# Altium PCB Buck-Boost Controller.PcbDoc
Units mm, origin at the board's own origin, x right, y up, seen from the top; angles counter-clockwise.
Board outline 34.92 x 11.94 mm, 2 copper layers (Top Layer, Bottom Layer); 13 components, 8 nets, 39 pads, 15 vias.
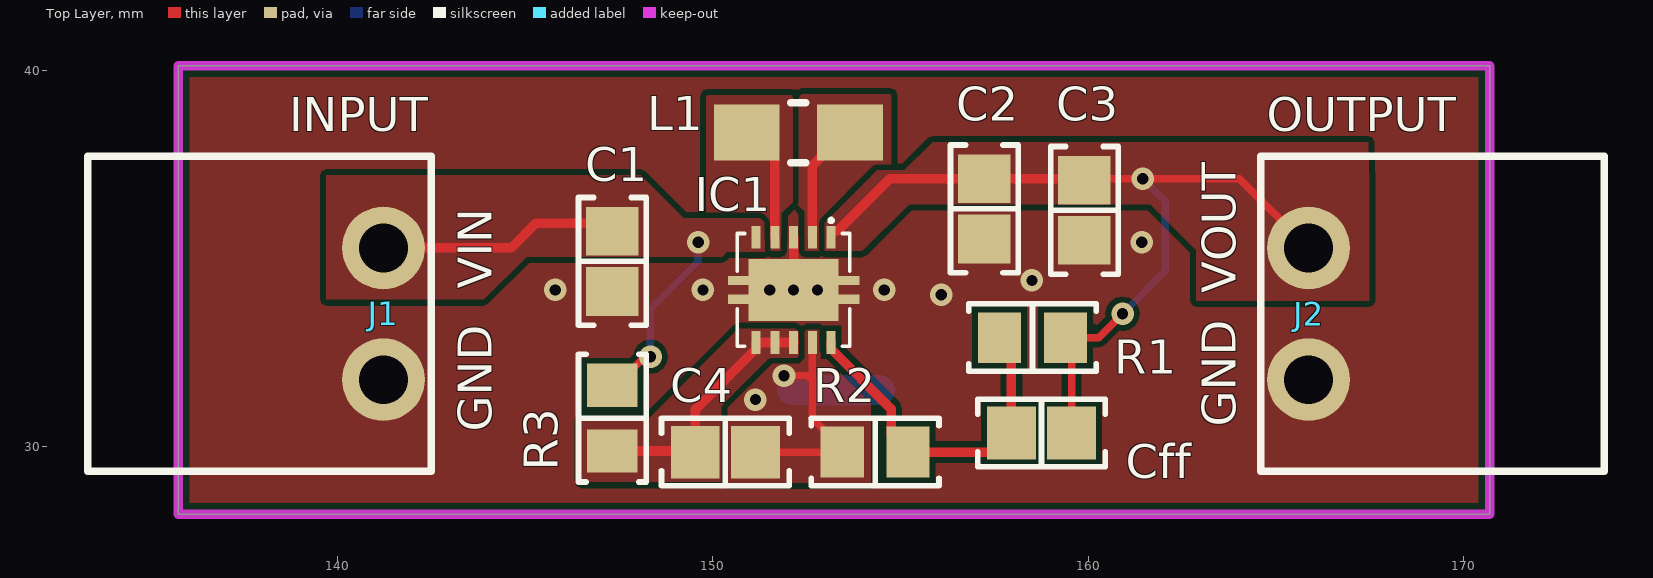
[diagram p0: Top Layer view]
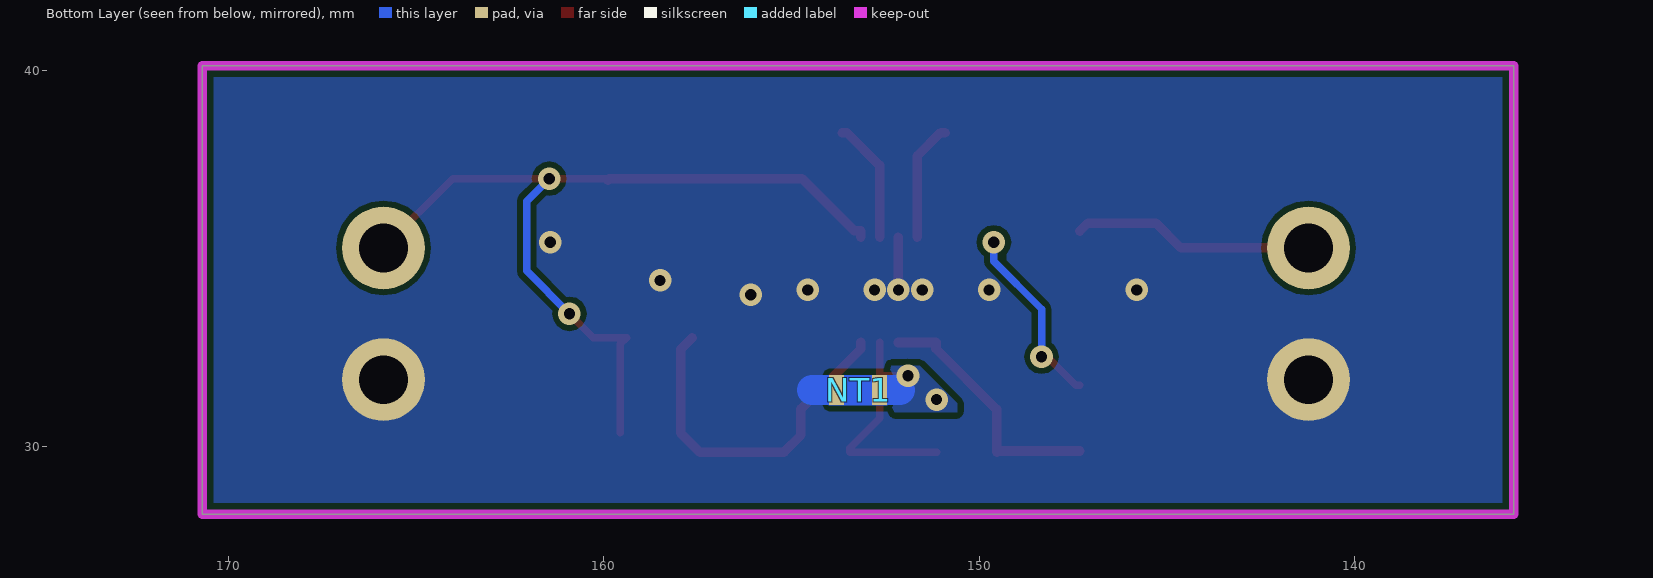
[diagram p1: Bottom Layer view, seen from below]
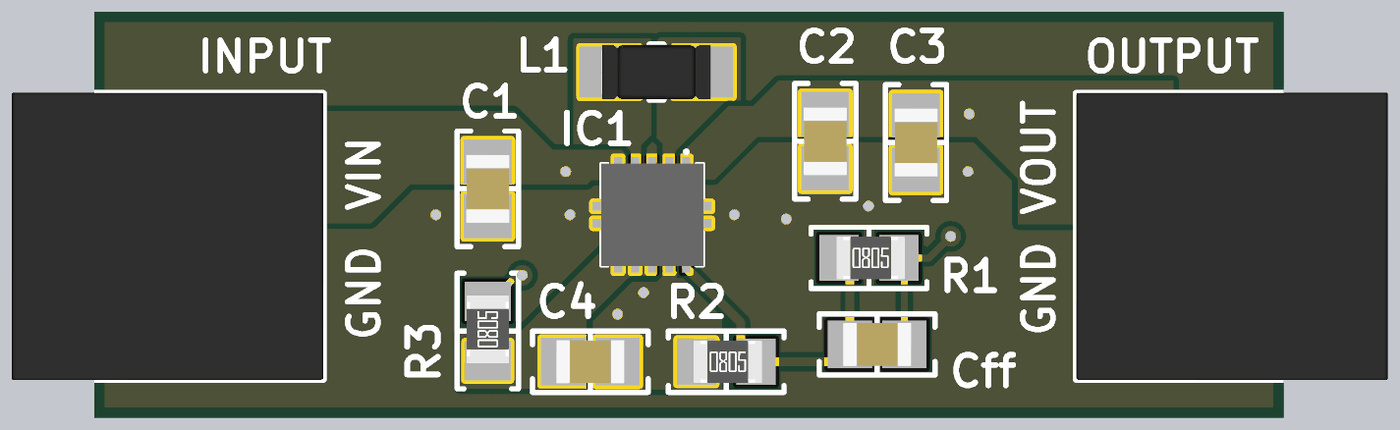
[diagram p2: 3D render of the assembled board from above, using the file's embedded part models]

## Layer stack, top to bottom
Top Solder: solder mask 0.0102, Solder Resist, Dk 3.5
Top Layer: signal copper 0.0356
Dielectric 1: dielectric 0.32, FR-4, Dk 4.8
Bottom Layer: signal copper 0.0356
Bottom Solder: solder mask 0.0102, Solder Resist, Dk 3.5

## Board outline
135.763,28.194 135.763,40.132 170.688,40.132 170.688,28.194

## Design rules (kind name [scope] priority, off if disabled: settings)
BoardOutlineClearance [All] p1: gap=0.3 ignorepadtopadclearanceinfootprint=FALSE
Clearance [All] p1: gap=0.15 ignorepadtopadclearanceinfootprint=FALSE
HoleSize [All] p1: absolutevalues=TRUE maxlimit=6.3 minlimit=0.2 maxpercent=80.000 minpercent=20.000
PolygonConnect [All] p1: connectstyle=Direct reliefconductorwidth=0.254 reliefentries=4 polygonreliefangle="90 Angle" airgapwidth=0.254
RoutingVias [All] p1: holewidth=0.6 width=1.2 viastyle="Through Hole" minholewidth=0.2 minwidth=0.5 maxholewidth=0.3 maxwidth=0.6
ShortCircuit ShortCircuit_1 [All] p1: allowed=FALSE
ShortCircuit NET_TIE [InNet('GND') And OnLayer('Bottom Layer') vs InNet('PGND') And OnLayer('Bottom Layer')] p2: allowed=FALSE
SilkToSilkClearance [All] p1: silktosilkclearance=0.16
SolderMaskExpansion [All] p1: expansion=0.102 istentingtop=FALSE
Width [All] p1: maxlimit=1 minlimit=0.127 preferedwidth=0.2
27 further rules are at their usual default settings.

## Components (designator, comment, footprint, x,y, rotation, side; value= is the part's Value field where it differs from the comment)
C1 "10µF" "CAP 0805_2012" 147.32,34.925 r90 top
C2 "10µF" "CAP 0805_2012" 157.226,36.322 r90 top
C3 "22µF" "CAP 0805_2012" 159.893,36.284 r90 top
C4 "0.1µF" "CAP 0805_2012" 150.33,29.845 r180 top
Cff "2.2pF" "CAP 0805_2012" 158.75,30.353 r0 top
IC1 "TPS63000" TPS63002DRCR 152.146,34.163 r270 top
J1 "0395021002" "MOLEX 395021002" 137.922,33.528 r90 top
J2 "0395021002" "MOLEX 395021002" 169.164,33.528 r270 top
L1 "2.2µH" "MURATA LQH31" 152.273,38.354 r0 top
NT1 "NetTie" NetTie_Narrow2 153.222,31.496 r180 bottom net-tie
R1 "1 MOhms" "RES 0805_2012" 158.51,32.893 r0 top
R2 "200 kOhms" "RES 0805_2012" 154.319,29.845 r0 top
R3 "100 Ohms" "RES 0805_2012" 147.32,30.748 r90 top

## Footprints (in the part's own frame and the unit in brackets; to place one, negate y for a bottom-side part, rotate by r counter-clockwise, add the part's x,y. Pads: shape width x height; smd on the part's side, far side on the other; paste and mask are expansions set on the pad)
"CAP 0805_2012" [mm] "Chip Capacitor, 2-Leads, Body 2.00x1.20mm, IPC Medium Density"
  rect 1.3x1.4 smd: 1(-0.8,0) 2(0.8,0)
  silkscreen extent -1.7,-0.9 1.7,0.9, body extent -1,-0.64 1,0.64, height 1.26
"MOLEX 395021002" [mil] "2 Position Terminal Block Header, Male Pins, 3.5mm Pitch,4.2x9.2mm Body, 90°, Right Angle, THT"
  round 86.61 hole 51: 1(-69,-130) 2(69,-130)
  silkscreen extent -165,-180 165,180, body extent -166,-180 166,180, height 280
"MURATA LQH31" [mm] "Power Inductor, 2-Leads,Murata, LQH31CN101K03L"
  rect 1.75x1.5 smd: 1(-1.375,0) 2(1.375,0)
  silkscreen extent -0.2,-0.8 0.2,0.8, body extent -1.6,-0.8 1.6,0.8, height 2
NetTie_Narrow2 [mm]
  rect 0.4x0.8 smd: 1(-0.575,0) 2(0.575,0)
  Top Layer region: -0.775,0.4 -0.775,-0.4 0.775,-0.4 0.775,0.4
"RES 0805_2012" [mm] "Chip Resistor, 2-Leads, Body 2.00x1.25mm, IPC Medium Density"
  rect 1.15x1.35 smd: 1(-0.875,0) 2(0.875,0)
  silkscreen extent -1.7,-0.9 1.7,0.9, body extent -0.95,-0.62 1.05,0.63, height 0.6
TPS63002DRCR [mm]
  rect 0.6x0.24 smd: 1(-1.4,1) 2(-1.4,0.5) 3(-1.4,0) 4(-1.4,-0.5) 5(-1.4,-1) 6(1.4,-1) 7(1.4,-0.5) 8(1.4,0) 9(1.4,0.5) 10(1.4,1)
  rect 1.65x2.4 smd: 11(0,0)
  rect 0.25x0.6 smd: 12(0.25,1.45) 13(-0.25,1.45) 14(0.25,-1.45) 15(-0.25,-1.45)
  silkscreen extent -1.9,-1.5 1.5,1.5, body extent -1.5,-1.5 1.5,1.5, height 1.1

## Part data
C1 C2: library part C2012X7R1A106M125AC, "CAP CER 10UF 10V X7R 0805", Device Package="0805 (2012 Metric)", Manufacturer="TDK Corporation", Operating Temperature="-55°C ~ 125°C", Supplier Part Number 1=445-7592-1-ND, Temperature Coefficient=X7R, Tolerance=±20%, Applications="General Purpose", Capacitance=10µF, ComponentLink1Description=Datasheet, ComponentLink1URL=https://product.tdk.com/info/en/catalog/datasheets/mlcc_commercial_general_en.pdf?ref_disty=digikey, ComponentLink2Description="DigiKey Link", ComponentLink2URL=http://digikey.com/product-detail/en/tdk-corporation/C2012X7R1A106M125AC/445-7592-1-ND/2733664, Features="Low ESL", LastUpdated="8/29/2020 11:47:30 PM", Lifecycle Status=Active, Minimum Order=1, Mounting Type="Surface Mount, MLCC", Package / Case="0805 (2012 Metric)", Packaging=TapeAndReel, Part Number=C2012X7R1A106M125AC, Part Status=Active, PartId=2994, Price=0.09, Series=C, Size / Dimension="0.079\" L x 0.049\" W (2.00mm x 1.25mm)", Supplier 1=DigiKey, Thickness (Max)="0.057\" (1.45mm)"
C3: library part CL21A226MPCLRNC, "CAP CER 22UF 10V X5R 0805", Device Package="0805 (2012 Metric)", Manufacturer="Samsung Electro-Mechanics", Operating Temperature="-55°C ~ 85°C", Supplier Part Number 1=1276-1822-1-ND, Temperature Coefficient=X5R, Tolerance=±20%, Applications="General Purpose", Capacitance=22µF, ComponentLink1Description=Datasheet, ComponentLink1URL=http://www.samsungsem.com/kr/support/product-search/mlcc/CL21A226MPCLRNC.jsp, ComponentLink2Description="DigiKey Link", ComponentLink2URL=http://digikey.com/product-detail/en/samsung-electro-mechanics/CL21A226MPCLRNC/1276-1822-1-ND/3889908, LastUpdated="8/29/2020 11:47:23 PM", Lifecycle Status=Active, Minimum Order=1, Mounting Type="Surface Mount, MLCC", Package / Case="0805 (2012 Metric)", Packaging=TapeAndReel, Part Number=CL21A226MPCLRNC, Part Status=Active, PartId=7485, Price=0.10, Series=CL, Size / Dimension="0.079\" L x 0.049\" W (2.00mm x 1.25mm)", Supplier 1=DigiKey, Thickness (Max)="0.037\" (0.95mm)"
C4: library part GCM21BR91H104KA37L, "CAP CER 0.1UF 50V X8R 0805", Device Package="0805 (2012 Metric)", Manufacturer="Murata Electronics", Operating Temperature="-55°C ~ 150°C", Ratings=AEC-Q200, Supplier Part Number 1=490-11165-1-ND, Temperature Coefficient=X8R, Tolerance=±10%, Applications=Automotive, Capacitance=0.1µF, ComponentLink1Description=Datasheet, ComponentLink1URL=https://www.murata.com/~/media/webrenewal/support/library/catalog/products/capacitor/mlcc/c03e.ashx?la=en-us, ComponentLink2Description="DigiKey Link", ComponentLink2URL=http://digikey.com/product-detail/en/murata-electronics/GCM21BR91H104KA37L/490-11165-1-ND/5333005, LastUpdated="8/29/2020 11:47:12 PM", Lifecycle Status=Active, Minimum Order=1, Mounting Type="Surface Mount, MLCC", Package / Case="0805 (2012 Metric)", Packaging=TapeAndReel, Part Number=GCM21BR91H104KA37L, Part Status=Active, PartId=12788, Price=0.07, Series=GCM, Size / Dimension="0.079\" L x 0.049\" W (2.00mm x 1.25mm)", Supplier 1=DigiKey, Thickness (Max)="0.055\" (1.40mm)"
Cff: library part C0805C229C1GAC7800, "CAP CER 2.2PF 100V NP0 0805", Device Package="0805 (2012 Metric)", Manufacturer=KEMET, Operating Temperature="-55°C ~ 125°C", Supplier Part Number 1=399-14578-1-ND, Temperature Coefficient="C0G, NP0", Tolerance=±0.25pF, Applications="General Purpose", Capacitance=2.2pF, ComponentLink1Description=Datasheet, ComponentLink1URL=https://api.kemet.com/component-edge/download/datasheet/C0805C229C1GACTU.pdf, ComponentLink2Description="DigiKey Link", ComponentLink2URL=http://digikey.com/product-detail/en/kemet/C0805C229C1GAC7800/399-14578-1-ND/7103870, Features="Low ESL", LastUpdated="8/29/2020 11:47:20 PM", Lifecycle Status=Active, Minimum Order=1, Mounting Type="Surface Mount, MLCC", Package / Case="0805 (2012 Metric)", Packaging=TapeAndReel, Part Number=C0805C229C1GAC7800, Part Status=Active, PartId=8962, Price=0.09, Series="SMD Comm C0G", Size / Dimension="0.079\" L x 0.049\" W (2.00mm x 1.25mm)", Supplier 1=DigiKey, Thickness (Max)="0.035\" (0.88mm)"
IC1: library part TPS63000DRCR, "Switching Regulator, Current-mode, 2A, 1500kHz Switching Freq-Max, PDSO10", Arrow Part Number=TPS63002DRCR, Manufacturer="Texas Instruments", Max Input Voltage=5.5V, Max Operating Temperature=85°C, Max Output Current=1.2A, Min Input Voltage=1.8V, Min Operating Temperature=-40°C, Min Output Voltage=1.2V, Mouser Part Number=595-TPS63002DRCR, Package Quantity=1, Quiescent Current=40uA, Supplier Part Number 1=296-19641-1-ND, Switching Frequency=1.5MHz, Arrow Price/Stock=https://www.arrow.com/en/products/tps63002drcr/texas-instruments, Category="Voltage Regulators - Switching", ComponentLink1Description=https://www.ti.com:443/lit/ds/symlink/tps63000.pdf?src-supplier=IHS+Markit, ComponentLink1URL=https://www.ti.com:443/lit/ds/symlink/tps63000.pdf?src-supplier=IHS+Markit, ComponentLink2Description=https://datasheet.ciiva.com/2025/tps63001-2025809.pdf?src-supplier=Digi-Key, ComponentLink2URL=https://datasheet.ciiva.com/2025/tps63001-2025809.pdf?src-supplier=Digi-Key, ComponentLink3Description=https://datasheet.ciiva.com/15113/getdatasheetpartid-252007-15113893.pdf?src-supplier=Verical, ComponentLink3URL=https://datasheet.ciiva.com/15113/getdatasheetpartid-252007-15113893.pdf?src-supplier=Verical, ComponentLink4Description=https://datasheet.ciiva.com/27052/1525749-27052325.pdf?src-supplier=Jameco, ComponentLink4URL=https://datasheet.ciiva.com/27052/1525749-27052325.pdf?src-supplier=Jameco, ComponentLink5Description=https://datasheet.ciiva.com/41462/001014937-da-01-en-ic-reg-buck-boo-tps63000drcr-vson-10-tid-41462784.pdf?src-supplier=Conrad, ComponentLink5URL=https://datasheet.ciiva.com/41462/001014937-da-01-en-ic-reg-buck-boo-tps63000drcr-vson-10-tid-41462784.pdf?src-supplier=Conrad, ComponentLink6Description=https://datasheet.ciiva.com/26896/tps63000drcr-26896660.pdf?src-supplier=IIIC, ComponentLink6URL=https://datasheet.ciiva.com/26896/tps63000drcr-26896660.pdf?src-supplier=IIIC, ComponentLink7Description=https://datasheet.ciiva.com/2025/tps63001-2025810.pdf?src-supplier=Digi-Key, ComponentLink7URL=https://datasheet.ciiva.com/2025/tps63001-2025810.pdf?src-supplier=Digi-Key, ComponentLink8Description=https://datasheet.ciiva.com/2025/tps63001-2025811.pdf?src-supplier=Digi-Key, ComponentLink8URL=https://datasheet.ciiva.com/2025/tps63001-2025811.pdf?src-supplier=Digi-Key, Datasheet Link=https://www.ti.com/lit/gpn/TPS63002, Efficiency=96%, Height=1mm, Lead Free="Lead Free", Manufacturer Part Number=TPS63000DRCR, Manufacturer_Name="Texas Instruments", Manufacturer_Part_Number=TPS63002DRCR, Max Output Voltage=5.5V, Mouser Price/Stock=https://www.mouser.co.uk/ProductDetail/Texas-Instruments/TPS63002DRCR?qs=QZuYiDxzHagvx6A2KHyUrA%3D%3D, Number of Outputs=1, Number of Pins=10, Operating Supply Voltage=5.5V, Output Current=1.2A, Output Type=Adjustable, Output Voltage=5.5V, Packaging="Tape and Reel", Pricing 1="1=2.21000, 10=1.98200, 25=1.87000, 100=1.49600, 250=1.30900, 500=1.27160, 1000=1.00980 (USD)", Radiation Hardening=No, REACH SVHC="No SVHC", RoHS=Yes, Stock 1=48373, Supplier 1=Digi-Key, Synchronous Rectifier=Yes, Topology=Buck-Boost, Weight=0.000921oz
J1 J2: "TERM BLOCK HDR 2POS 90DEG 3.5MM", Color=Black, Current - UL=8A, Manufacturer=Molex, Operating Temperature="-40°C ~ 105°C", Supplier Part Number 1=WM7770-ND, Voltage - UL=300V, ComponentLink1Description=Datasheet, ComponentLink1URL=https://www.molex.com/pdm_docs/sd/395021002_sd.pdf, ComponentLink2Description="DigiKey Link", ComponentLink2URL=http://digikey.com/product-detail/en/molex/0395021002/WM7770-ND/1280621, Contact Mating Finish=Tin, Header Orientation="90°, Right Angle", LastUpdated="6/25/2020 3:44:05 PM", Lifecycle Status=Active, Minimum Order=1, Mounting Type="Through Hole", Number of Levels=1, Number of Positions=2, Packaging=Tray, Part Number=0395021002, Part Status=Active, Pitch="0.138\" (3.50mm)", Positions Per Level=2, Price=0.58, Series="Eurostyle ESE 39502", Supplier 1=DigiKey, Termination Style=Solder, Type="Header, Male Pins, Shrouded (4 Side)"
L1: library part LQH31CN2R2M03L, "FIXED IND 2.2UH 430MA 410 MOHM", Current Rating (Amps)=430mA, DC Resistance (DCR)="533mOhm Max", Device Package="1206 (3216 Metric)", Frequency - Self Resonant=50MHz, Inductance Frequency - Test=1MHz, Manufacturer="Murata Electronics", Operating Temperature="-40°C ~ 85°C", Supplier Device Package=1206, Supplier Part Number 1=490-8392-1-ND, Tolerance=±20%, ComponentLink1Description=Datasheet, ComponentLink1URL=https://search.murata.co.jp/Ceramy/image/img/P02/JELF243A-0031.pdf, ComponentLink2Description="DigiKey Link", ComponentLink2URL=http://digikey.com/product-detail/en/murata-electronics/LQH31CN2R2M03L/490-8392-1-ND/4380691, Height - Seated (Max)="0.079\" (2.00mm)", Inductance=2.2µH, LastUpdated="8/30/2020 12:20:20 AM", Lifecycle Status=Active, Material - Core="1206 (3216 Metric)", Minimum Order=1, Mounting Type="Surface Mount", Package / Case="1206 (3216 Metric)", Packaging=TapeAndReel, Part Number=LQH31CN2R2M03L, Part Status=Active, PartId=3599, Price=0.29, Series=LQH31, Shielding=Unshielded, Size / Dimension="0.126\" L x 0.063\" W (3.20mm x 1.60mm)", Supplier 1=DigiKey, Type=Wirewound
R1: library part CRCW08051M00FKEB, "RES SMD 1M OHM 1% 1/8W 0805", Device Package="0805 (2012 Metric)", Manufacturer="Vishay Dale", Operating Temperature="-55°C ~ 155°C", Power (Watts)="0.125W, 1/8W", Ratings=AEC-Q200, Supplier Device Package=0805, Supplier Part Number 1=541-CRCW08051M00FKEBCT-ND, Temperature Coefficient=±100ppm/°C, Tolerance=±1%, ComponentLink1Description=Datasheet, ComponentLink1URL=http://www.vishay.com/docs/20035/dcrcwe3.pdf, ComponentLink2Description="DigiKey Link", ComponentLink2URL=http://digikey.com/product-detail/en/vishay-dale/CRCW08051M00FKEB/541-CRCW08051M00FKEBCT-ND/11500801, Composition="Thick Film", Features="Automotive AEC-Q200", LastUpdated="8/29/2020 11:58:00 PM", Lifecycle Status=Active, Minimum Order=1, Number of Terminations=2, Package / Case="0805 (2012 Metric)", Packaging=TapeAndReel, Part Number=CRCW08051M00FKEB, PartId=57214, Price=0.01, Resistance="1 MOhms", Series=CRCW, Supplier 1=DigiKey
R2: library part ERA-6AED204V, "RES 200K OHM 0.5% 1/8W 0805", Device Package="0805 (2012 Metric)", Manufacturer="Panasonic Electronic Components", Operating Temperature="-55°C ~ 155°C", Power (Watts)="0.125W, 1/8W", Ratings=AEC-Q200, Supplier Device Package=0805, Supplier Part Number 1=P123822CT-ND, Temperature Coefficient=±25ppm/°C, Tolerance=±0.5%, ComponentLink1Description=Datasheet, ComponentLink1URL=https://industrial.panasonic.com/cdbs/www-data/pdf/RDM0000/AOA0000C307.pdf, ComponentLink2Description="DigiKey Link", ComponentLink2URL=http://digikey.com/product-detail/en/panasonic-electronic-components/ERA-6AED204V/P123822CT-ND/9467751, Composition="Thin Film", Features="Automotive AEC-Q200", Height - Seated (Max)="0.024\" (0.60mm)", LastUpdated="8/29/2020 11:58:26 PM", Lifecycle Status=Active, Minimum Order=1, Number of Terminations=2, Package / Case="0805 (2012 Metric)", Packaging=TapeAndReel, Part Number=ERA-6AED204V, Part Status=Active, PartId=44055, Price=0.01, Resistance="200 kOhms", Series=ERA-6A, Size / Dimension="0.079\" L x 0.049\" W (2.00mm x 1.25mm)", Supplier 1=DigiKey
R3: library part ASC0805-100RF1, "RES 100 OHM 1% 1/8W 0805", Device Package="0805 (2012 Metric)", Manufacturer=Riedon, Operating Temperature="-55°C ~ 155°C", Power (Watts)="0.125W, 1/8W", Ratings=AEC-Q200, Supplier Device Package=0805, Supplier Part Number 1=696-1783-1-ND, Temperature Coefficient=±100ppm/°C, Tolerance=±1%, ComponentLink1Description=Datasheet, ComponentLink1URL=https://riedon.com/media/pdf/ASC.pdf, ComponentLink2Description="DigiKey Link", ComponentLink2URL=http://digikey.com/product-detail/en/riedon/ASC0805-100RF1/696-1783-1-ND/7398753, Composition="Thick Film", Features="Anti-Sulfur, Automotive AEC-Q200, Moisture Resistant", Height - Seated (Max)="0.024\" (0.60mm)", LastUpdated="8/29/2020 11:58:13 PM", Lifecycle Status=Active, Minimum Order=1, Number of Terminations=2, Package / Case="0805 (2012 Metric)", Packaging=TapeAndReel, Part Number=ASC0805-100RF1, Part Status=Active, PartId=47944, Price=0.03, Resistance="100 Ohms", Series=ASC, Size / Dimension="0.079\" L x 0.049\" W (2.00mm x 1.25mm)", Supplier 1=DigiKey

## Via types
v1: diameter 0.6, hole 0.3, Top Layer to Bottom Layer, tented both sides, 15 vias

## Nets (pads, with @x,y where several pads share a name; then routed paths per layer and width w, separated by ;. In a path a pad name is that pad's centre, name@x,y a point inside that pad or via, vN(x,y) a via of type N, cw(c..) or ccw(c..) an arc to the next point about the centre after c; other vN are vias at no path point)
GND: C4.1 IC1.9 NT1.2 R2.1 | length 7.1
  Top Layer w0.2: C4.1 R2.1 153.444,29.945 152.646,30.743 152.646,31.753 ; v1(151.13,31.242) v1@151.194,31.242 ; v1@151.828,31.877 v1(151.892,31.877) 152.522,31.877 152.646,31.753 ; IC1.9 152.646,31.753
  Bottom Layer w0.2: 152.061,31.45 152.107,31.496
  Bottom Layer w0.8: 152.107,31.496 NT1.2
L1: IC1.4 L1.1 | length 3.2
  Top Layer w0.254: L1.1 151.023,38.354 151.646,37.731 IC1.4
L2: IC1.2 L1.2 | length 3.3
  Top Layer w0.254: IC1.2 152.646,37.477 153.523,38.354 L1.2
NetCff_1: Cff.1 IC1.10 R1.1 R2.2 | length 9.4
  Top Layer w0.254: IC1.10 153.146,32.597 154.746,30.997 154.746,30.293 R2.2 157.442,29.845 Cff.1 157.95,32.578 R1.1
PGND: C1.1 C2.1 C3.1 IC1.3 IC1.11 IC1.12 IC1.13 IC1.14 IC1.15 J1.1 J2.2 NT1.1 | length 2.1
  Top Layer w0.254: v1(152.146,34.163) IC1.3
  Bottom Layer w0.2: 154.446,31.496 154.475,31.525
  Bottom Layer w0.8: NT1.1 154.446,31.496
  other v1: 156.083,34.036 145.796,34.163 149.733,34.163 151.511,34.163 152.781,34.163 154.559,34.163 158.496,34.417 161.417,35.433
VIN: C1.2 IC1.5 J1.2 R3.2 | length 11.4
  Top Layer w0.2: R3.2 147.42,31.623 148.182,32.385 v1(148.336,32.385)
  Top Layer w0.254: J1.2 144.628,35.281 145.288,35.941 147.104,35.941 C1.2
  Bottom Layer w0.2: v1(148.336,32.385) 148.336,33.655 149.606,34.925 v1(149.606,35.433)
VINA: C4.2 IC1.6 IC1.7 IC1.8 R3.1 | length 6.8
  Top Layer w0.254: R3.1 149.502,29.873 C4.2 149.53,30.981 151.146,32.597 IC1.6 IC1.7 IC1.8
VOUT: C2.2 C3.2 Cff.2 IC1.1 J2.1 R1.2 | length 23.1
  Top Layer w0.2: Cff.2 159.55,32.728 R1.2 160.274,32.893 v1(160.909,33.528) v1@160.986,33.605 ; C3.2 159.934,37.125 v1(161.45,37.125) 164.018,37.125 J2.1
  Top Layer w0.254: IC1.1 153.146,35.729 153.153,35.736 153.319,35.736 154.705,37.122 C2.2 159.855,37.122 C3.2
  Bottom Layer w0.2: v1(160.909,33.528) 162.05,34.669 162.05,36.525 v1(161.45,37.125)

## Polygon pours and split planes (outlines as drawn)
PGND on Top Layer "PGND_L01_P011" (solid, remove dead copper, pour order 11): 135.763,40.132 135.763,28.194 170.688,28.194 170.688,40.132
L2 on Top Layer "L2_L01_P009" (solid, remove dead copper, pour order 9): 152.45,35.2 152.85,35.2 152.85,36.025 152.9,36.025 154.3,37.425 154.75,37.425 154.75,39.35 154.725,39.375 152.3,39.375 152.3,39.325 152.175,39.2 152.2,39.175 152.2,36.475 152.225,36.475 152.45,36.25
L1 on Top Layer "L1_L01_P008" (solid, remove dead copper, pour order 8): 151.8,35.2 151.475,35.2 151.475,35.925 151.2,36.2 151.175,36.175 149.825,36.175 149.825,39.3 149.775,39.35 152.2,39.35 152.125,39.275 152.125,36.5 151.825,36.2 151.825,36.075
VOUT on Top Layer "VOUT_L01_P006" (solid, remove dead copper, pour order 6): 167.475,37.025 167.475,33.875 162.875,33.875 162.875,35.225 161.65,36.45 155.225,36.45 153.975,35.2 152.975,35.2 152.975,35.95 154.375,37.35 155.1,37.35 155.85,38.1 167.45,38.1
no net on Top Layer "NONET_L01_P005" (solid, pour order 5): 162.45,35.975
VINA on Top Layer "VINA_L01_P004" (solid, remove dead copper, pour order 4): 152.25,33.125 152.325,33.125 152.325,32.325 152.275,32.275 151.45,32.275 150.225,31.05 150.225,29.05 146.5,29.05 146.475,29.075 146.475,30.725 148.275,30.725 150.675,33.125
no net on Top Layer "NONET_L01_P003" (solid, pour order 3): 150.1,32.95
no net on Top Layer "NONET_L01_P002" (solid, pour order 2): 152.25,33.125
GND on Top Layer "GND_L01_P001" (solid, remove dead copper, pour order 1): 152.5,33.1 152.45,33.05 152.45,32.35 152.3,32.2 151.575,32.2 150.4,31.025 150.4,29.025 154.2,29.025 154.2,31.15 152.825,32.525 152.825,33.1
VIN on Top Layer "VIN_L01_P000" (solid, remove dead copper, pour order 0): 139.7,37.211 139.7,33.909 143.891,33.909 145.034,35.052 150.241,35.052 150.368,35.179 151.384,35.179 151.384,35.941 151.257,36.068 149.225,36.068 148.082,37.211
PGND on Bottom Layer "PGND_L02_P014" (solid, remove dead copper, pour order 14): 135.763,40.132 135.763,28.194 170.688,28.194 170.688,40.132
GND on Bottom Layer "GND_L02_P013" (solid, remove dead copper, pour order 13): 151.575,32.15 150.575,31.15 150.575,30.925 150.55,30.9 152.447,30.9 152.447,32.15

## Keep-outs
Keep-Out Layer:
  the board outline again, w0.254

## Silkscreen, mask and mechanical layers (free items; w line width, h text height)
Top Overlay:
  text "INPUT" at 138.717,38.387 h0.9
  text "OUTPUT" at 164.752,38.387 h0.9
  text "VIN" at 144.112,34.196 h0.9 r90
  text "VOUT" at 163.924,34.069 h0.9 r90
  text "GND" at 163.924,30.513 h0.9 r90
  text "GND" at 144.112,30.386 h0.9 r90